# Altium PCB PCB1.PcbDoc (part 2 of 2)
Units mil, origin at the board's own origin, x right, y up, seen from the top; angles counter-clockwise.
Board outline 6000 x 4000 mil, 4 copper layers (Top Layer, Mid Layer 1, Mid Layer 2, Bottom Layer), stack 64.961 mil thick; 76 components, 53 nets, 288 pads, 57 vias.
Unrouted connection lines stored in the file: 62.
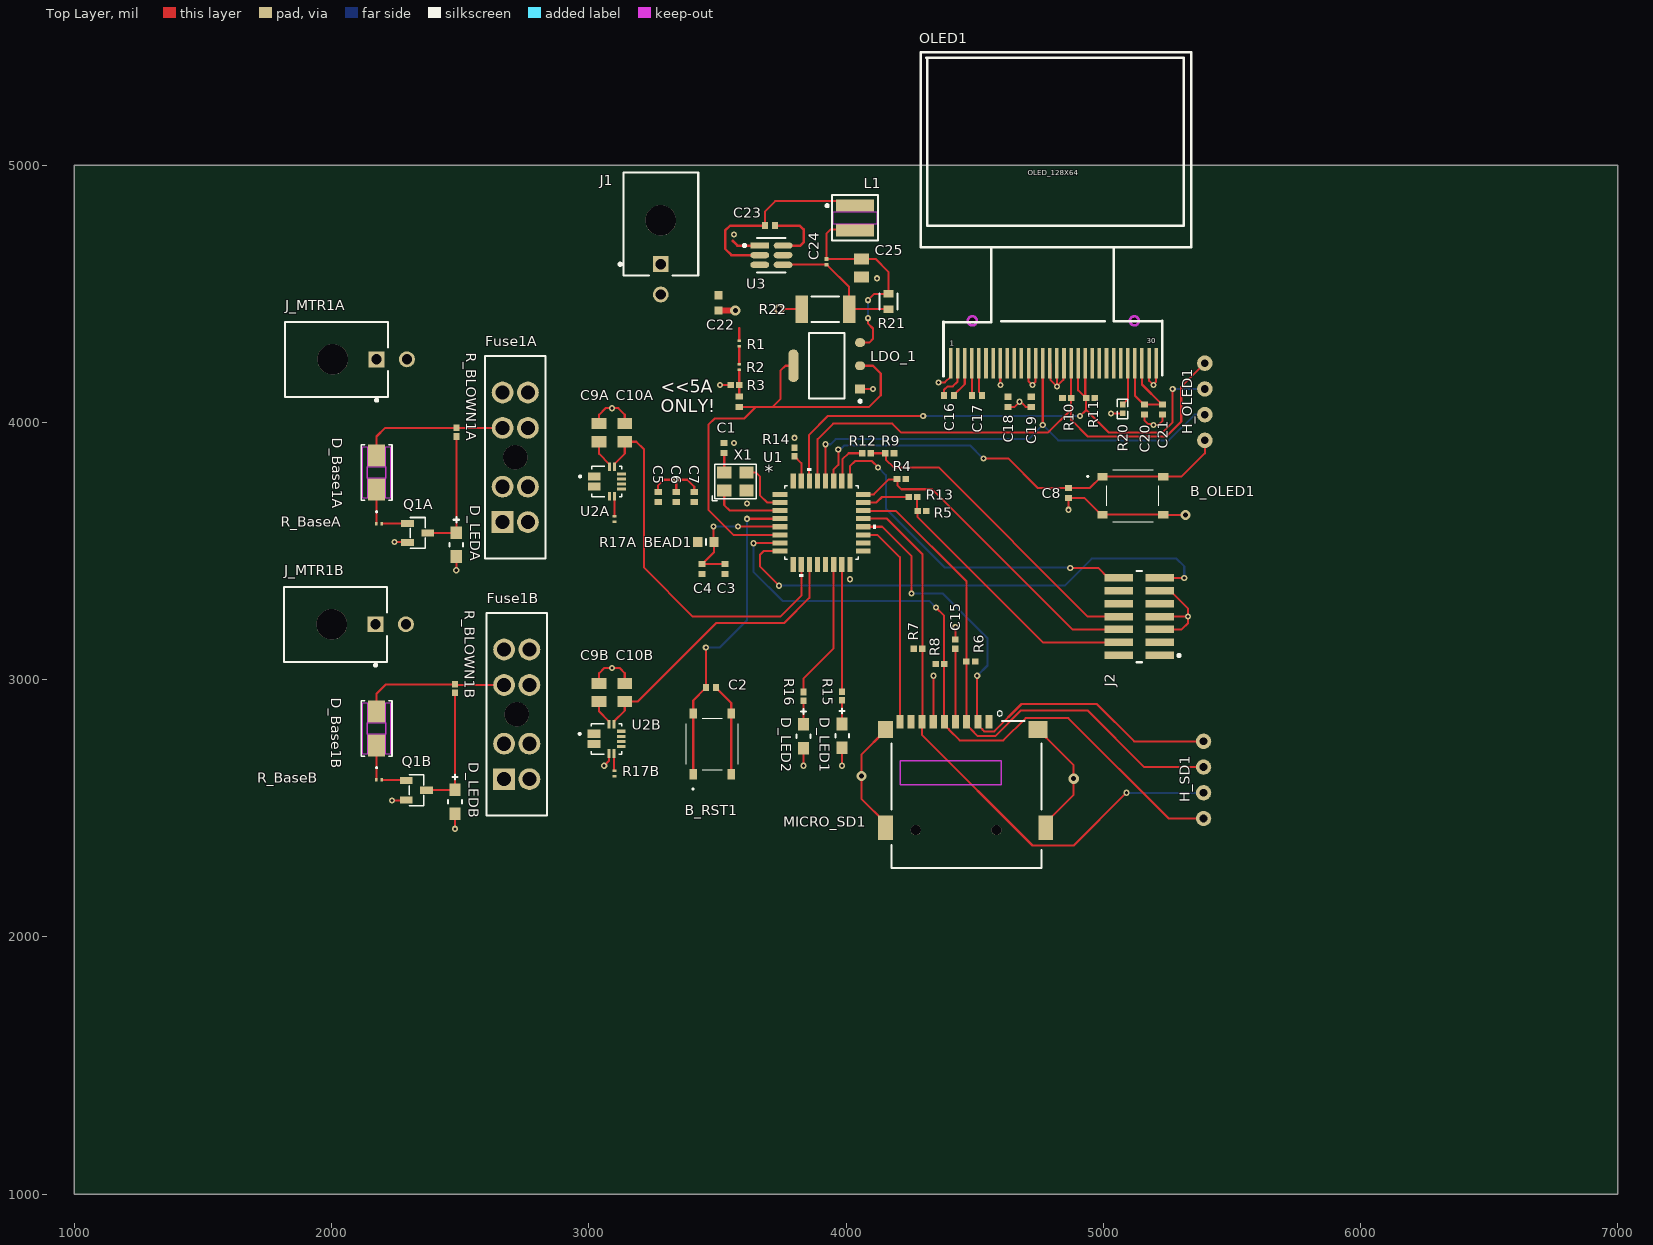
[diagram p0: Top Layer view]

## Part data (continued)
R1: "Resistor, 300kΩ, ±1%, 100mW, 75V, ±100ppm/℃, -55℃~+155℃, SMD 0603", JLCPCB Basic Part=Yes, JLCPCB Part Number=C23024, Manufacturer=Uniroyal, Package Size=0603, Power Rating=100mW, Resistance=300kΩ, Temperature Coefficient=±100ppm/℃, Temperature Rating=-55℃~+155℃, Tolerance=±1%, Voltage Rating=75V, Category=Resistors, ComponentLink1Description=Datasheet, ComponentLink1URL=https://wmsc.lcsc.com/wmsc/upload/file/pdf/v2/lcsc/2206010116_UNI-ROYAL-Uniroyal-Elec-0603WAF3003T5E_C23024.pdf, ComponentLink2Description="JLCPCB Part URL", ComponentLink2URL=https://jlcpcb.com/partdetail/C23024, Manufacturer Part Number=0603WAF3003T5E, Supplier 1=LCSC, Supplier Part Number 1=C23024
R2: "Resistor, 510kΩ, ±1%, 100mW, 75V, ±100ppm/℃, -55℃~+155℃, SMD 0603", JLCPCB Basic Part=Yes, JLCPCB Part Number=C23192, Manufacturer=Uniroyal, Package Size=0603, Power Rating=100mW, Resistance=510kΩ, Temperature Coefficient=±100ppm/℃, Temperature Rating=-55℃~+155℃, Tolerance=±1%, Voltage Rating=75V, Category=Resistors, ComponentLink1Description=Datasheet, ComponentLink1URL=https://wmsc.lcsc.com/wmsc/upload/file/pdf/v2/lcsc/2206010116_UNI-ROYAL-Uniroyal-Elec-0603WAF5103T5E_C23192.pdf, ComponentLink2Description="JLCPCB Part URL", ComponentLink2URL=https://jlcpcb.com/partdetail/C23192, Manufacturer Part Number=0603WAF5103T5E, Supplier 1=LCSC, Supplier Part Number 1=C23192
R3: "Resistor, 100kΩ, ±1%, 62.5mW, 50V, ±100ppm/℃, -55℃~+155℃, SMD 0402", JLCPCB Basic Part=Yes, JLCPCB Part Number=C25741, Manufacturer=Uniroyal, Package Size=0402, Power Rating=62.5mW, Resistance=100kΩ, Temperature Coefficient=±100ppm/℃, Temperature Rating=-55℃~+155℃, Tolerance=±1%, Voltage Rating=50V, Category=Resistors, ComponentLink1Description=Datasheet, ComponentLink1URL=https://wmsc.lcsc.com/wmsc/upload/file/pdf/v2/lcsc/2206010100_UNI-ROYAL-Uniroyal-Elec-0402WGF1003TCE_C25741.pdf, ComponentLink2Description="JLCPCB Part URL", ComponentLink2URL=https://jlcpcb.com/partdetail/C25741, Manufacturer Part Number=0402WGF1003TCE, Supplier 1=LCSC, Supplier Part Number 1=C25741
R4 R5 R6 R7 R8 R9 R10 R11 R14: "Resistor, 10kΩ, ±1%, 62.5mW, 50V, ±100ppm/℃, -55℃~+155℃, SMD 0402", JLCPCB Basic Part=Yes, JLCPCB Part Number=C25744, Manufacturer=Uniroyal, Package Size=0402, Power Rating=62.5mW, Resistance=10kΩ, Temperature Coefficient=±100ppm/℃, Temperature Rating=-55℃~+155℃, Tolerance=±1%, Voltage Rating=50V, Category=Resistors, ComponentLink1Description=Datasheet, ComponentLink1URL=https://wmsc.lcsc.com/wmsc/upload/file/pdf/v2/lcsc/2206010100_UNI-ROYAL-Uniroyal-Elec-0402WGF1002TCE_C25744.pdf, ComponentLink2Description="JLCPCB Part URL", ComponentLink2URL=https://jlcpcb.com/partdetail/C25744, Manufacturer Part Number=0402WGF1002TCE, Supplier 1=LCSC, Supplier Part Number 1=C25744
R12 R13: "Resistor, 22Ω, ±1%, 62.5mW, 50V, ±200ppm/℃, -55℃~+155℃, SMD 0402", JLCPCB Basic Part=Yes, JLCPCB Part Number=C25092, Manufacturer=Uniroyal, Package Size=0402, Power Rating=62.5mW, Resistance=22Ω, Temperature Coefficient=±200ppm/℃, Temperature Rating=-55℃~+155℃, Tolerance=±1%, Voltage Rating=50V, Category=Resistors, ComponentLink1Description=Datasheet, ComponentLink1URL=https://wmsc.lcsc.com/wmsc/upload/file/pdf/v2/lcsc/2205311900_UNI-ROYAL-Uniroyal-Elec-0402WGF220JTCE_C25092.pdf, ComponentLink2Description="JLCPCB Part URL", ComponentLink2URL=https://jlcpcb.com/partdetail/C25092, Manufacturer Part Number=0402WGF220JTCE, Supplier 1=LCSC, Supplier Part Number 1=C25092
R15 R16: "Resistor, 100Ω, ±1%, 62.5mW, 50V, ±200ppm/℃, -55℃~+155℃, SMD 0402", JLCPCB Basic Part=Yes, JLCPCB Part Number=C25076, Manufacturer=Uniroyal, Package Size=0402, Power Rating=62.5mW, Resistance=100Ω, Temperature Coefficient=±200ppm/℃, Temperature Rating=-55℃~+155℃, Tolerance=±1%, Voltage Rating=50V, Category=Resistors, ComponentLink1Description=Datasheet, ComponentLink1URL=https://wmsc.lcsc.com/wmsc/upload/file/pdf/v2/lcsc/2205311900_UNI-ROYAL-Uniroyal-Elec-0402WGF1000TCE_C25076.pdf, ComponentLink2Description="JLCPCB Part URL", ComponentLink2URL=https://jlcpcb.com/partdetail/C25076, Manufacturer Part Number=0402WGF1000TCE, Supplier 1=LCSC, Supplier Part Number 1=C25076
R17A R17B: "Resistor, 1kΩ, ±1%, 100mW, 75V, ±100ppm/℃, -55℃~+155℃, SMD 0603", JLCPCB Basic Part=Yes, JLCPCB Part Number=C21190, Manufacturer=Uniroyal, Package Size=0603, Power Rating=100mW, Resistance=1kΩ, Temperature Coefficient=±100ppm/℃, Temperature Rating=-55℃~+155℃, Tolerance=±1%, Voltage Rating=75V, Category=Resistors, ComponentLink1Description=Datasheet, ComponentLink1URL=https://wmsc.lcsc.com/wmsc/upload/file/pdf/v2/lcsc/2206010130_UNI-ROYAL-Uniroyal-Elec-0603WAF1001T5E_C21190.pdf, ComponentLink2Description="JLCPCB Part URL", ComponentLink2URL=https://jlcpcb.com/partdetail/C21190, Manufacturer Part Number=0603WAF1001T5E, Supplier 1=LCSC, Supplier Part Number 1=C21190
R20: library part 0402WGF3903TCE, "390k Resistor", JLCPCB Part Class="Extended Part", LCSC Part Name="390kΩ ±1% 62.5mW 厚膜电阻", Manufacturer=UNI-ROYAL(厚声), Operating Temperature Range=-55℃~+155℃, Temperature Coefficient=±100ppm/℃, Tolerance=±1%, Add into BOM=yes, Convert to PCB=yes, Datasheet=https://atta.szlcsc.com/upload/public/pdf/source/20200306/C422600_1E6D84923E4A46A82E41ADD87F860B5C.pdf, Device=0402WGF3903TCE, Manufacturer Part=0402WGF3903TCE, Supplier=LCSC, Supplier Footprint=0402, Supplier Part=C25782, Symbol=0402WGF3903TCE, Type="Thick Film Resistors"
R21: library part CMP-02407-005189-1, "RES Thick Film, 100kΩ, 1%, 0.1W, 100ppm/°C, 0603", Case/Package=0603, Max Operating Temperature=155°C, Max Power Dissipation=100mW, Min Operating Temperature=-55°C, Package Quantity=5000, Resistance=100kR, Temperature Coefficient=100ppm/°C, Tolerance=1%, Composition="Thick Film", Features="Automotive AEC-Q200", Height=0.02inch, Lead Free="Lead Free", Length=0.061inch, Number of Terminations=2, Packaging="Tape and Reel", Width=0.033inch
R22: library part CMP-1017-00637-1, "13K7 0.75W 1% 2010 (5025 Metric)  SMD", Case-EIA=2010, Case-Metric=5025, Power="0.75 W", Tolerance="1 %", Technology=SMT
R_BaseA R_BaseB: "Resistor, 10kΩ, ±1%, 100mW, 75V, ±100ppm/℃, -55℃~+155℃, SMD 0603", JLCPCB Basic Part=Yes, JLCPCB Part Number=C25804, Manufacturer=Uniroyal, Package Size=0603, Power Rating=100mW, Resistance=10kΩ, Temperature Coefficient=±100ppm/℃, Temperature Rating=-55℃~+155℃, Tolerance=±1%, Voltage Rating=75V, Category=Resistors, ComponentLink1Description=Datasheet, ComponentLink1URL=https://wmsc.lcsc.com/wmsc/upload/file/pdf/v2/lcsc/2206010045_UNI-ROYAL-Uniroyal-Elec-0603WAF1002T5E_C25804.pdf, ComponentLink2Description="JLCPCB Part URL", ComponentLink2URL=https://jlcpcb.com/partdetail/C25804, Manufacturer Part Number=0603WAF1002T5E, Supplier 1=LCSC, Supplier Part Number 1=C25804
R_BLOWN1A R_BLOWN1B: "Resistor, 12kΩ, ±1%, 62.5mW, 50V, ±100ppm/℃, -55℃~+155℃, SMD 0402", JLCPCB Basic Part=Yes, JLCPCB Part Number=C25752, Manufacturer=Uniroyal, Package Size=0402, Power Rating=62.5mW, Resistance=12kΩ, Temperature Coefficient=±100ppm/℃, Temperature Rating=-55℃~+155℃, Tolerance=±1%, Voltage Rating=50V, Category=Resistors, ComponentLink1Description=Datasheet, ComponentLink1URL=https://wmsc.lcsc.com/wmsc/upload/file/pdf/v2/lcsc/2206010100_UNI-ROYAL-Uniroyal-Elec-0402WGF1202TCE_C25752.pdf, ComponentLink2Description="JLCPCB Part URL", ComponentLink2URL=https://jlcpcb.com/partdetail/C25752, Manufacturer Part Number=0402WGF1202TCE, Supplier 1=LCSC, Supplier Part Number 1=C25752
U1: "No Description Available", Mfr_Name=STMicroelectronics, RefDes=RefDes, Type=Type
U2A U2B: "Current Sensor 31A 1 Channel Hall Effect, Open Loop Bidirectional 12-PowerWFQFN", Package="QFN-12 Allegro MicroSystems LLC", Availability="In Stock", Check_prices=https://www.snapeda.com/parts/ACS711KEXLT-31AB-T/Allegro+MicroSystems+LLC/view-part/?ref=eda, MF="Allegro MicroSystems LLC", MP=ACS711KEXLT-31AB-T, Price=None, Purchase-URL=https://pricing.snapeda.com/search/part/ACS711KEXLT-31AB-T/?ref=eda, SnapEDA_Link=https://www.snapeda.com/parts/ACS711KEXLT-31AB-T/Allegro+MicroSystems+LLC/view-part/?ref=snap
U3: library part CMP-04918-000439-1, "IC REG BUCK ADJ 2A TSOT23-6", Case/Package=SOT-23-6, Max Input Voltage=28V, Max Operating Temperature=125°C, Min Input Voltage=4.5V, Min Operating Temperature=-40°C, Min Output Voltage=596mV, Output Current=2A, Quiescent Current=40uA, Switching Frequency=500kHz, Lead Free="Lead Free", Max Output Voltage=28V, Mount="Surface Mount", Number Of Outputs=1, Output Configuration=Positive, Output Type=Adjustable, Packaging="Tape and Reel", RoHS Compliant=Yes, Synchronous Rectifier=Yes
X1: library part SX3M32.768KM20F30TNN, Current - Supply=90uA, Frequency Stability=±30ppm, JLCPCB Part Class="Extended Part", LCSC Part Name="32.768kHz ±20ppm 1.62V~3.63V CMOS", Manufacturer=SCTF(星通时频), Normal temperature Frequency Tolerance=±20ppm, Operating Temperature=-40℃~+85℃, Voltage - Supply=1.62V~3.63V, Add into BOM=yes, Convert to PCB=yes, Datasheet=https://atta.szlcsc.com/upload/public/pdf/source/20240605/38A6F081BC26201D4BADAAB4D2EED01C.pdf, Device=SX3M32.768KM20F30TNN, Manufacturer Part=SX3M32.768KM20F30TNN, Output Type=CMOS, Supplier=LCSC, Supplier Footprint=SMD3225-4P, Supplier Part=C2901582, Symbol=SX3M32.768KM20F30TNN

## Free pads (board coordinates)
  rect 27.56x23.62 smd: 3(3585,4060) 3(3585,4100)

## Via types
v1: diameter 24, hole 12, Top Layer to Bottom Layer, 52 vias
v2: diameter 40, hole 20, Top Layer to Bottom Layer, 5 vias

## Nets (pads, with @x,y where several pads share a name; then routed paths per layer and width w, separated by ;. In a path a pad name is that pad's centre, name@x,y a point inside that pad or via, vN(x,y) a via of type N, cw(c..) or ccw(c..) an arc to the next point about the centre after c; other vN are vias at no path point)
3V3: BEAD1.1 C1.2 C5.2 C6.2 C7.2 C9A.2 C9B.2 C15.1 C18.2 C19.2 J2.3 MICRO_SD1.4 OLED1.6 OLED1.9 OLED1.11 R4.2 R5.2 R6.2 R7.2 R8.2 R9.2 R10.2 R11.2 R17A.2 R17B.2 U1.1 U1.17 U2A.12 U2B.12 X1.4 | length 578.2
  Top Layer w8: C9B.2 3040,2876.06 3078.46,2837.6 U2B.12 ; C9A.2 3040,3877.76 3079.84,3837.91 U2A.12 ; C1.2 3526.69,3878.62 X1.4 ; C15.1 4425,2837.3 MICRO_SD1.4
26V1: C22.2 J1.1 R1.2 U2A.1 U2B.1 U3.3 | length 51.7
  Top Layer w10: J1.1 J1.1@3282.4,4612.6 ; R1.2 3585,4365
\C\S\: H_SD1.4 MICRO_SD1.2 U1.20 | length 2093.7
  Top Layer w8: U1.20 4140.75,3594.25 4255,3480 v1(4255,3335) ; v1(4510,3015) 4510,2838.91 MICRO_SD1.2 4512.48,2824.62 4530.01,2807.09 4530.01,2805.87 4537.04,2798.84 4576.22,2798.84 4682.37,2905 4975,2905 5120,2760 H_SD1.4
  Bottom Layer w8: v1(4255,3335) 4375,3335 4550,3160 4550,3055 v1(4510,3015)
ADC1_IN8: U1.9
AVDD: BEAD1.2 C3.2 C4.2 U1.5 | length 514.7
  Top Layer w8: v1(3485,3595) 3485,3536.5 BEAD1.2 3486.5,3494.21 3441.97,3449.69 C4.2 C3.2 ; v1(3580,3595) 3580.37,3594.63 3742.63,3594.63 U1.5
  Bottom Layer w8: v1(3485,3595) v1(3580,3595)
BOOT0: R14.2 U1.31 | length 107.1
  Top Layer w8: R14.2 3800,3867.28 3826.26,3841.02 U1.31
CardDetect: MICRO_SD1.CD1 U1.19 | length 817.6
  Top Layer w8: U1.19 4122.24,3562.76 4209.33,3475.67 MICRO_SD1.CD1
GND: B_OLED1.C1 B_OLED1.D1 B_RST1.C1 B_RST1.D1 C1.1 C2.1 C3.1 C4.1 C5.1 C6.1 C7.1 C8.1 C9A.1 C9B.1 C10A.1 C10B.1 C15.2 C18.1 C19.1 C20.1 C21.1 C22.1 C25.1 D_LED1.2 D_LED2.2 D_LEDA.2 D_LEDB.2 J1.2 J2.5 J2.7 J2.11 J_MTR1A.2 J_MTR1B.2 LDO_1.1 MICRO_SD1.6 MICRO_SD1.MP1 MICRO_SD1.MP2 MICRO_SD1.MP3 MICRO_SD1.MP4 OLED1.1 OLED1.8 OLED1.10 OLED1.12 OLED1.13 OLED1.15 OLED1.16 OLED1.17 OLED1.29 OLED1.30 Q1A.2 Q1B.2 R3.1 R14.1 R20.1 R22.1 U1.16 U1.32 U2A.5 U2B.5 U3.1 X1.2 | length 5028.9
  Top Layer w8: v1(2235,2530) 2288.03,2530 Q1B.2 ; v1(2245,3535) 2293.23,3535 Q1A.2 ; v1(2480,2420) D_LEDB.2 ; v1(2485,3425) D_LEDA.2 ; C9B.1 3040,3025 3060,3045 v1(3090,3045) 3120,3045 3140,3025 C10B.1 ; C9A.1 3040,4030 3065,4055 v1(3090,4055) 3115,4055 3140,4030 C10A.1 ; v1(3060,2665) 3078.46,2683.46 U2B.5 ; C5.1 3270,3755 3291.94,3776.94 3336.94,3776.94 v1(3340,3780) 3343.06,3776.94 3383.06,3776.94 3410,3750 C7.1 ; C6.1 v1@3340,3776.94 ; C2.1 3494.68,2968.03 3553.82,2908.9 B_RST1.D1 B_RST1.C1 ; v1(3510,4145) R3.1 ; v2(3740,4440) R22.1 ; v1(3835,2665) D_LED2.2 ; v1(3985,2665) D_LED1.2 ; LDO_1.1 4054.88,4130 v1(4105,4130) ; MICRO_SD1.MP2 4153.49,2443.58 4060,2537.07 v2(4060,2625) 4060,2708.48 4153.49,2801.97 MICRO_SD1.MP1 ; MICRO_SD1.6 4340,2837.18 v1(4340,3015) ; v1(4360,4155) 4360.44,4155.44 4384,4155.44 4406.49,4177.93 OLED1.1 ; C15.2 v1(4425,3205) ; OLED1.8 4599.7,4229.7 4599.7,4145.3 v1(4600,4145) ; C18.1 4655.31,4060.32 v1(4675,4080) 4679.16,4080 4698.84,4060.32 C19.1 ; OLED1.12 4709.64,4160.36 v1(4725,4145) 4725,4146.74 4737.2,4158.94 OLED1.13 ; MICRO_SD1.MP4 4750,2805.97 4778.5,2777.47 4778.5,2773.47 4885,2666.97 v2(4885,2615) 4885,2552.07 4776.51,2443.58 MICRO_SD1.MP3 ; OLED1.15 4794.62,4227.7 4794.62,4165.38 v1@4819.94,4140.06 ; OLED1.16 4819.94,4229.94 v1@4819.94,4140.06 ; OLED1.17 4845.26,4227.82 4845.26,4165.26 v1(4820,4140) v1@4819.94,4140.06 ; v1(4865,3660) C8.1 4927.83,3705.32 4991.97,3641.18 B_OLED1.C1 B_OLED1.D1 5234.29,3640 v2(5320,3640) ; v1(5030,4035) R20.1 ; C20.1 5160,4007.63 5174.57,3993.06 5191.94,3993.06 v1(5195,3990) 5215,3990 5230,4005 C21.1 ; OLED1.29 5178.15,4161.85 v1(5195,4145) 5195,4148.14 5205.71,4158.85 OLED1.30 ; J2.5 5305,3195 5330,3220 v1@5330,3241.94 ; J2.7 v1(5330,3245) 5330,3275.47 5260.47,3345 J2.11
  Top Layer w10: 3560,4705 3577.6,4687.4 U3.1
  Top Layer w25: C22.1 v2(3570,4435)
  other v1: 4015,3390 3615,3685 3565,3920 3800,3940 4120,4560 3565,4730
I2C1_SCL: H_OLED1.1 OLED1.18 R10.1 U1.29 | length 2189
  Top Layer w8: U1.29 3889.63,3772.37 3889.63,3934.63 3950,3995 4180,3995 4215,3960 4785,3960 4875,4050 ; OLED1.18 R10.1 4875,4050 ; H_OLED1.1 5303.34,4138.34 5303.34,4003.34 5245,3945 4940,3945 4875,4010 4875,4050
I2C1_SDA: H_OLED1.2 OLED1.19 OLED1.20 R11.1 U1.30 | length 2272.3
  Top Layer w8: U1.30 3856.38,3773.38 3856.38,3951.38 3930,4025 v1(4300,4025) ; OLED1.19 4902.56,4124.72 4932.28,4095 R11.1 ; v1(4910,4025) 4933.27,4048.27 ; OLED1.20 4930.12,4098.15 R11.1 ; v1(5270,4130) 5270,4000 5231,3961 5020.54,3961 4933.27,4048.27 ; 4933.27,4048.27 R11.1
  Bottom Layer w8: v1(4300,4025) v1(4910,4025) ; v1(5270,4130) H_OLED1.2
LED1: R15.1 U1.15 | length 494.5
  Top Layer w8: R15.1@3983.74,2953.46 U1.15
LED2: R16.1 U1.14 | length 544.8
  Top Layer w8: R16.1 3835,3005 3952.24,3122.24 U1.14
LSE_EN: U1.3 X1.1 | length 282.3
  Top Layer w8: X1.1 3526.69,3678.31 3547.76,3657.24 U1.3
LSE_Out: U1.2 X1.3 | length 220.6
  Top Layer w8: X1.3 3650.55,3804.45 3665,3790 3665,3716.7 3692.96,3688.74 U1.2
MCU_VCP_RX: J2.14 U1.25 | length 1375
  Top Layer w8: U1.25 4015.24,3829.76 4035.47,3850 4100,3850 v1(4125,3825) ; v1(4871.62,3434.09) 4980.44,3434.09 5019.53,3395 J2.14
  Bottom Layer w8: v1(4125,3825) 4155,3795 4155,3665 4385,3435 v1@4871.62,3435
MCU_VCP_TX: J2.13 U1.8 | length 2005.7
  Top Layer w8: v1(3740,3365) 3665,3440 3665,3484.53 3680.24,3499.76 U1.8 ; J2.13 v1(5315,3395)
  Bottom Layer w8: v1(3740,3365) 4850,3365 4955,3470 5285,3470 5315,3440 v1(5315,3395)
NetC16_1: C16.1 OLED1.3 | length 142.4
  Top Layer w8: C16.1 4419.69,4106.97 4461.61,4148.89 OLED1.3
NetC16_2: C16.2 OLED1.2 | length 159
  Top Layer w8: C16.2 4381.09,4105.78 4381.09,4126.09 4395,4140 4415.1,4140 4434.05,4158.94 OLED1.2
NetC17_1: C17.1 OLED1.5 | length 130.2
  Top Layer w8: OLED1.5 4516.73,4119.61 4529.37,4106.97 C17.1
NetC17_2: C17.2 OLED1.4 | length 125.3
  Top Layer w8: OLED1.4 4489.59,4229.59 4489.59,4105.41 C17.2
NetC20_2: C20.2 C21.2 OLED1.27 OLED1.28 | length 437.6
  Top Layer w8: OLED1.27 5123.03,4104.37 5158.03,4069.37 C20.2 5160.16,4069.53 5227.87,4069.53 5228.03,4069.69 5150.59,4147.13 OLED1.28
NetC23_1: C23.1 U3.6 | length 251.5
  Top Layer w10: C23.1 3820,4765 3835,4750 3835,4700 3822.4,4687.4 U3.6
NetC23_2: C23.2 L1.1 U3.2 | length 807.1
  Top Layer w8: C23.2 3685.31,4820.31 3725,4860 4018.23,4860 L1.1
  Top Layer w10: U3.2 3555,4650 3530,4675 3530,4745 3550,4765 C23.2
NetC24_1: C24.1 R21.2 R22.2 U3.4 | length 533.5
  Top Layer w8: U3.4 3756.63,4613.94 3925,4613.94 3925,4613.27 3928.87,4609.39 3929.54,4609.39 4012.52,4526.42 R22.2 4012.99,4440.47 R21.2
NetC24_2: C24.2 C25.2 L1.2 LDO_1.3 R21.1 | length 867
  Top Layer w8: C24.2 3925,4635.43 3925,4735 3940,4750 L1.2@4035,4750 ; C24.2@3925.43,4635.43 C25.2 4114.57,4635.43 4165,4585 R21.1 4109.53,4499.53 v1(4085,4475) ; LDO_1.3 4090.16,4310.16 4105,4325 4105,4365 4085,4385 v1(4085,4405)
  Bottom Layer w8: v1(4085,4405) v1(4085,4475)
NetD_Base1A_1: D_Base1A.1 R_BaseA.2 | length 134.3
  Top Layer w8: R_BaseA.2 2174.17,3738.17 D_Base1A.1
NetD_Base1A_2: D_Base1A.2 Fuse1A.2 J_MTR1A.1 R_BLOWN1A.2 | length 577.9
  Top Layer w8: D_Base1A.2 2175,3945 2208.46,3978.46 R_BLOWN1A.2 2485.12,3978.35 Fuse1A.2@2665,3978.35
NetD_Base1B_1: D_Base1B.1 R_BaseB.2 | length 134.3
  Top Layer w8: R_BaseB.2 2174.17,2743.17 D_Base1B.1
NetD_Base1B_2: D_Base1B.2 Fuse1B.2 J_MTR1B.1 R_BLOWN1B.2 | length 581.1
  Top Layer w8: D_Base1B.2 2175,2945 2211.73,2981.73 R_BLOWN1B.2 2482.56,2979.17 Fuse1B.2@2670.79,2979.17
NetD_LED1_1: D_LED1.1 R15.2 | length 92.5
  Top Layer w8: D_LED1.1 R15.2
NetD_LED2_1: D_LED2.1 R16.2 | length 92
  Top Layer w8: D_LED2.1 R16.2
NetD_LEDA_1: D_LEDA.1 Q1A.3 R_BLOWN1A.1 | length 484.9
  Top Layer w8: Q1A.3 2483.74,3570 D_LEDA.1 R_BLOWN1A.1
NetD_LEDB_1: D_LEDB.1 Q1B.3 R_BLOWN1B.1 | length 488.2
  Top Layer w8: Q1B.3 2478.74,2570 D_LEDB.1 R_BLOWN1B.1
NetOLED1_26: OLED1.26 R20.2 | length 169.4
  Top Layer w8: R20.2 5075,4069.59 5095.47,4090.05 OLED1.26
NetQ1A_1: Q1A.1 R_BaseA.1 | length 101.7
  Top Layer w8: R_BaseA.1 2195.83,3606.48 2196.75,3607.4 Q1A.1
NetQ1B_1: Q1B.1 R_BaseB.1 | length 95.9
  Top Layer w8: R_BaseB.1 2288.03,2610 Q1B.1
NetR1_1: R1.1 R2.2 | length 68.3
  Top Layer w10: R2.2 R1.1
NetR17A_1: R17A.1 U2A.6 | length 78.1
  Top Layer w8: U2A.6 3099.76,3712.68 3099.76,3635.24 R17A.1
NetR17B_1: R17B.1 U2B.6 | length 68.1
  Top Layer w8: U2B.6 3098.15,2646.75 3099.07,2645.83 R17B.1
NRST: B_RST1.A1 B_RST1.B1 C2.2 J2.12 U1.4 | length 1240.4
  Top Layer w8: B_RST1.A1 B_RST1.B1 3406.18,2918.9 3455.31,2968.03 3455.16,2968.19 3455.16,3124.84 v1(3455,3125) ; v1(3615,3625) 3615.37,3625.37 3742.63,3625.37 U1.4
  Bottom Layer w8: v1(3455,3125) 3510,3125 3615,3230 v1(3615,3625)
OLED_NRST: H_OLED1.3 OLED1.14 U1.28 | length 1955.7
  Top Layer w8: v1(3920,3915) 3920.37,3914.63 3920.37,3772.37 U1.28 ; v1@4764.76,3990 OLED1.14
  Bottom Layer w8: v1(3920,3915) 3940,3915 3960,3935 4710,3935 v1(4765,3990) 4825,3930 5255,3930 5355,4030 H_OLED1.3
OLED_TOGGLE: B_OLED1.A1 B_OLED1.B1 C8.2 H_OLED1.4 U1.27 | length 1736.1
  Top Layer w8: U1.27 3952.24,3817.24 3970,3835 v1(3970,3895) ; v1(4535,3860) 4630,3860 4745,3745 4864.69,3745 C8.2 4947.83,3744.69 4991.97,3788.82 B_OLED1.A1 B_OLED1.B1 5303.82,3788.82 5395,3880 H_OLED1.4
  Bottom Layer w8: v1(3970,3895) 3973.06,3898.06 3980.75,3898.06 3992.69,3910 4482.31,3910 4532.31,3860 v1(4535,3860)
OPAMP1_VINP: LDO_1.2 LDO_1.4 pad.3 R2.1 R3.2 U1.6 | length 1924.6
  Top Layer w8: pad.3@3585,4060 3650,4060 ; U1.6 3562.24,3562.76 3465,3660 3465,3990 3490,4015 3605,4015 3650,4060 ; LDO_1.4 3765,4220 3745,4200 3745,4090 3715,4060 ; LDO_1.2 4105,4220 4135,4190 4135,4105 4090,4060 3715,4060 ; 3650,4060 3715,4060
  Top Layer w10: pad.3@3585,4100 R3.2 R2.1
SPI1_MISO: H_SD1.2 MICRO_SD1.7 R7.1 U1.21 | length 2347.9
  Top Layer w8: U1.21 4159.25,3625.75 4296.73,3488.27 R7.1 4296.73,2837.22 MICRO_SD1.7 4295.94,2784.06 4725,2355 4885,2355 v1(5090,2560)
  Bottom Layer w8: v1(5090,2560) H_SD1.2
SPI1_MOSI: H_SD1.3 MICRO_SD1.3 R6.1 U1.22 | length 2145.4
  Top Layer w8: U1.22 4068.12,3656.12 4193.88,3656.12 4468.27,3381.73 R6.1 4468.27,2837.34 MICRO_SD1.3 4469.17,2824.62 4486.7,2807.09 4486.7,2805.87 4512.57,2780 4580,2780 4680,2880 4940,2880 5160,2660 H_SD1.3
SPI1_SCK: H_SD1.1 MICRO_SD1.5 R8.1 U1.7 | length 2681.2
  Top Layer w8: v1(3640,3530) 3640.63,3530.63 3742.37,3530.63 U1.7 ; v1(4350,3280) 4381.73,3248.27 R8.1 4381.73,2837.26 MICRO_SD1.5 4382.56,2824.62 4400.09,2807.09 4400.09,2805.87 4441.96,2764 4611.63,2764 4698.1,2850.47 4864.53,2850.47 5255,2460 H_SD1.1
  Bottom Layer w8: v1(3640,3530) 3640,3420 3755,3305 4325,3305 v1(4350,3280)
SWCLK: J2.6 R4.1 U1.24 | length 1269.6
  Top Layer w8: U1.24 4108.5,3720.24 4166.54,3778.27 R4.1@4195,3778.27 ; R4.1 4200,3778.27 4200,3755 4215,3740 4335,3740 4880,3195 J2.6
SWDIO: J2.4 R5.1 R13.1 R13.2 U1.23 | length 1247.2
  Top Layer w8: U1.23 4118.74,3688.74 4140,3710 R13.1 ; R13.2 4276.73,3656.54 R5.1 4278.27,3631.73 4765,3145 J2.4
SWO: J2.8 R9.1 R12.1 R12.2 U1.26 | length 1411.9
  Top Layer w8: U1.26 3986,3774.26 3986,3856 4010,3880 R12.1 ; R12.2 R9.1 4155,3878.27 4155,3855 4185,3825 4360,3825 4940,3245 J2.8
Vi_motor1: C10A.2 U1.10 U2A.11 | length 1506.6
  Top Layer w8: U2A.11 3099.53,3837.91 3140,3878.39 C10A.2 3184.93,3924.57 3215,3894.49 3215,3435 3405,3245 3745,3245 3826.26,3326.26 U1.10
Vi_motor2: C10B.2 U1.11 U2B.11 | length 1120.1
  Top Layer w8: U2B.11 3098.15,2837.6 3140,2879.45 C10B.2 3189.57,2914.57 3495,3220 3760,3220 3857.76,3317.76 U1.11
Vmotor1: Fuse1A.1 U2A.3 | length 0.4
  Top Layer w8: U2A.3@3021.06,3750 U2A.3
Vmotor2: Fuse1B.1 U2B.3 | length 1.2
  Top Layer w8: U2B.3@3019.17,2750.83 U2B.3
pads on no net: Fuse1A. Fuse1B. J1. J2.1 J2.2 J2.9 J2.10 J_MTR1A. J_MTR1B. MICRO_SD1. MICRO_SD1.1 MICRO_SD1.8 OLED1.7 OLED1.21 OLED1.22 OLED1.23 OLED1.24 OLED1.25 U1.12 U1.13 U1.18 U2A.7 U2A.8 U2A.9 U2A.10 U2B.7 U2B.8 U2B.9 U2B.10 U3.5

## Polygon pours and split planes (outlines as drawn)
GND on Mid Layer 1 "GND_L02_P000" (solid, pour order 0): 1650,4985 5475,4985 5475,2125 1650,2125

## Silkscreen, mask and mechanical layers (free items; w line width, h text height)
Top Overlay:
  text "<<5A  / ONLY!" at 3280,4040 h50

## Text inside footprints (layer, text, board x,y; h text height)
OLED1: Top Overlay "1" at 4402.56,4296.92 h20; Top Overlay "30" at 5169.49,4307.15 h20; Top Overlay "OLED_128X64" at 4706.06,4960.96 h20
U1: Top Overlay "*" at 3685,3785 h50; Mechanical 13 "*" at 3769.5,3710.98 h50